# EAGLE board BackPanel (EAGLE 6.5.0)

Size 45 x 18.5 mm. Coordinates in mm from the lower left corner, seen from the top.
Outline: 3,0 42,0 arc90 45,3 45,15.5 arc90 42,18.5 3,18.5 arc90 0,15.5 0,3 arc90 3,0
Copper layers (1*16): Top 0.0356mm / dielectric 1.5011mm / Bottom 0.0356mm
Design rules "LaenPCBOrder": minimum track width 6mil, minimum drill 13mil, track to track 6mil, track to pad 6mil, pad to pad 6mil, via to via 6mil, smd to smd 6mil, copper to edge 15mil, drill to drill 6mil, minimum pad ring 7mil, minimum via ring 7mil, stop-mask expansion 3mil, vias tented up to drill 0mil, thermal gap 10mil
Holes 2.5 mm at 2.75,2.75 2.75,15.75 42.25,15.75 42.25,2.75
bKeepout: area 1.4,10 to 43.6,11.6

## Footprints (pad centres in the part's own frame; a part is rotated, then mirrored left to right if it is on the bottom)
FC68125-FP = hole 6: 0,0

## Placement (x,y rotation side)
U$1  [FC68125-FP]  35.8,6.9 0 top
U$2  [FC68125-FP]  22.5,6.9 0 top
U$3  [FC68125-FP]  9.2,6.9 0 top

## Library data of the parts
U$1-U$3 = TinyMix3-FrontPanel

## Text on the board
Top: 1 | 2 | 3
Bottom: Hey Dave…don't turn it on, / take it apart!
tPlace: 1 | 2 | 3